# Altium PCB TT1-1A-BASIS.PcbDoc
Units mm, origin at the board's own origin, x right, y up, seen from the top; angles counter-clockwise.
Board outline 120 x 120 mm, 2 copper layers (Top Layer, Bottom Layer), stack 1.57 mm thick; 49 components, 43 nets, 150 pads, 0 vias.
Unrouted connection lines stored in the file: 81.
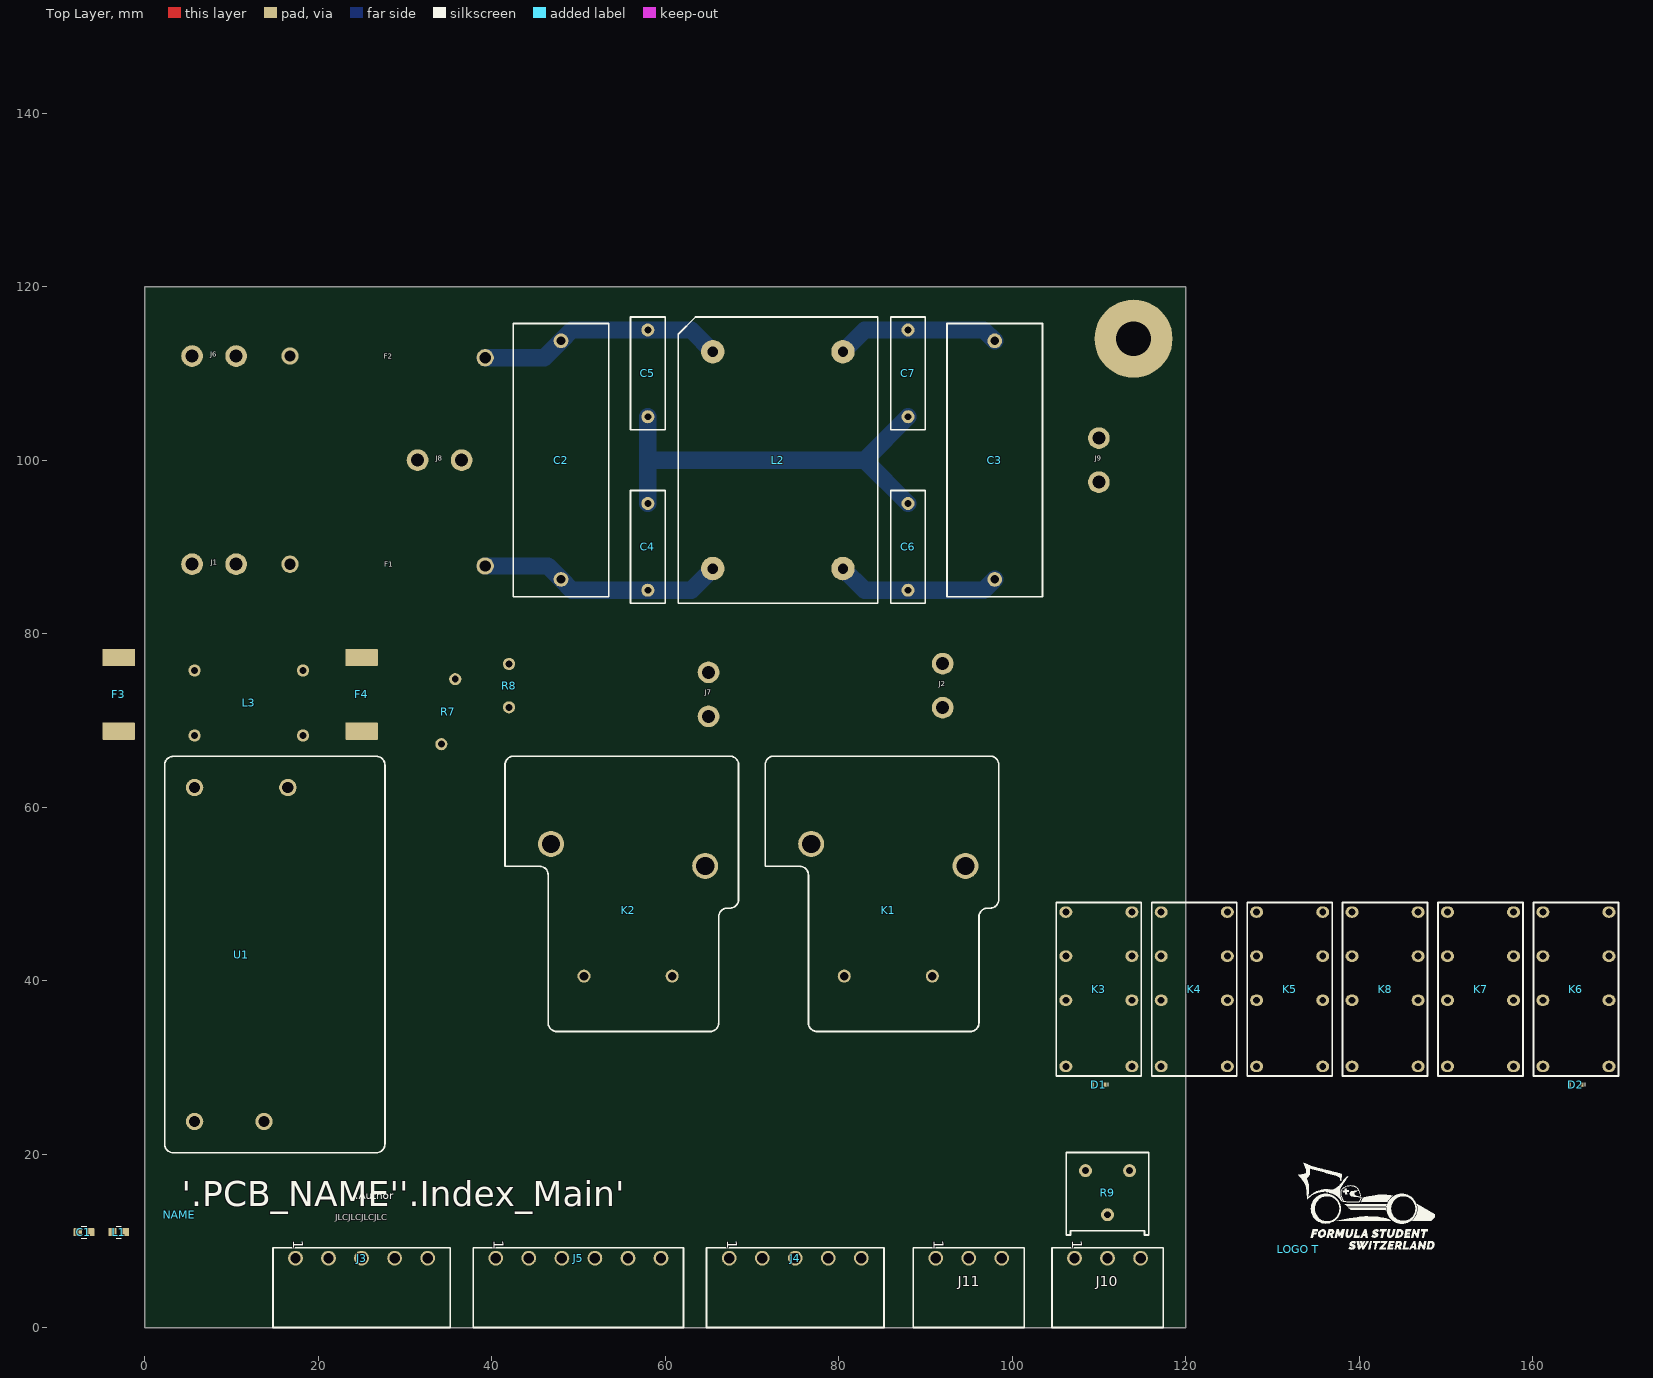
[diagram p0: Top Layer view]
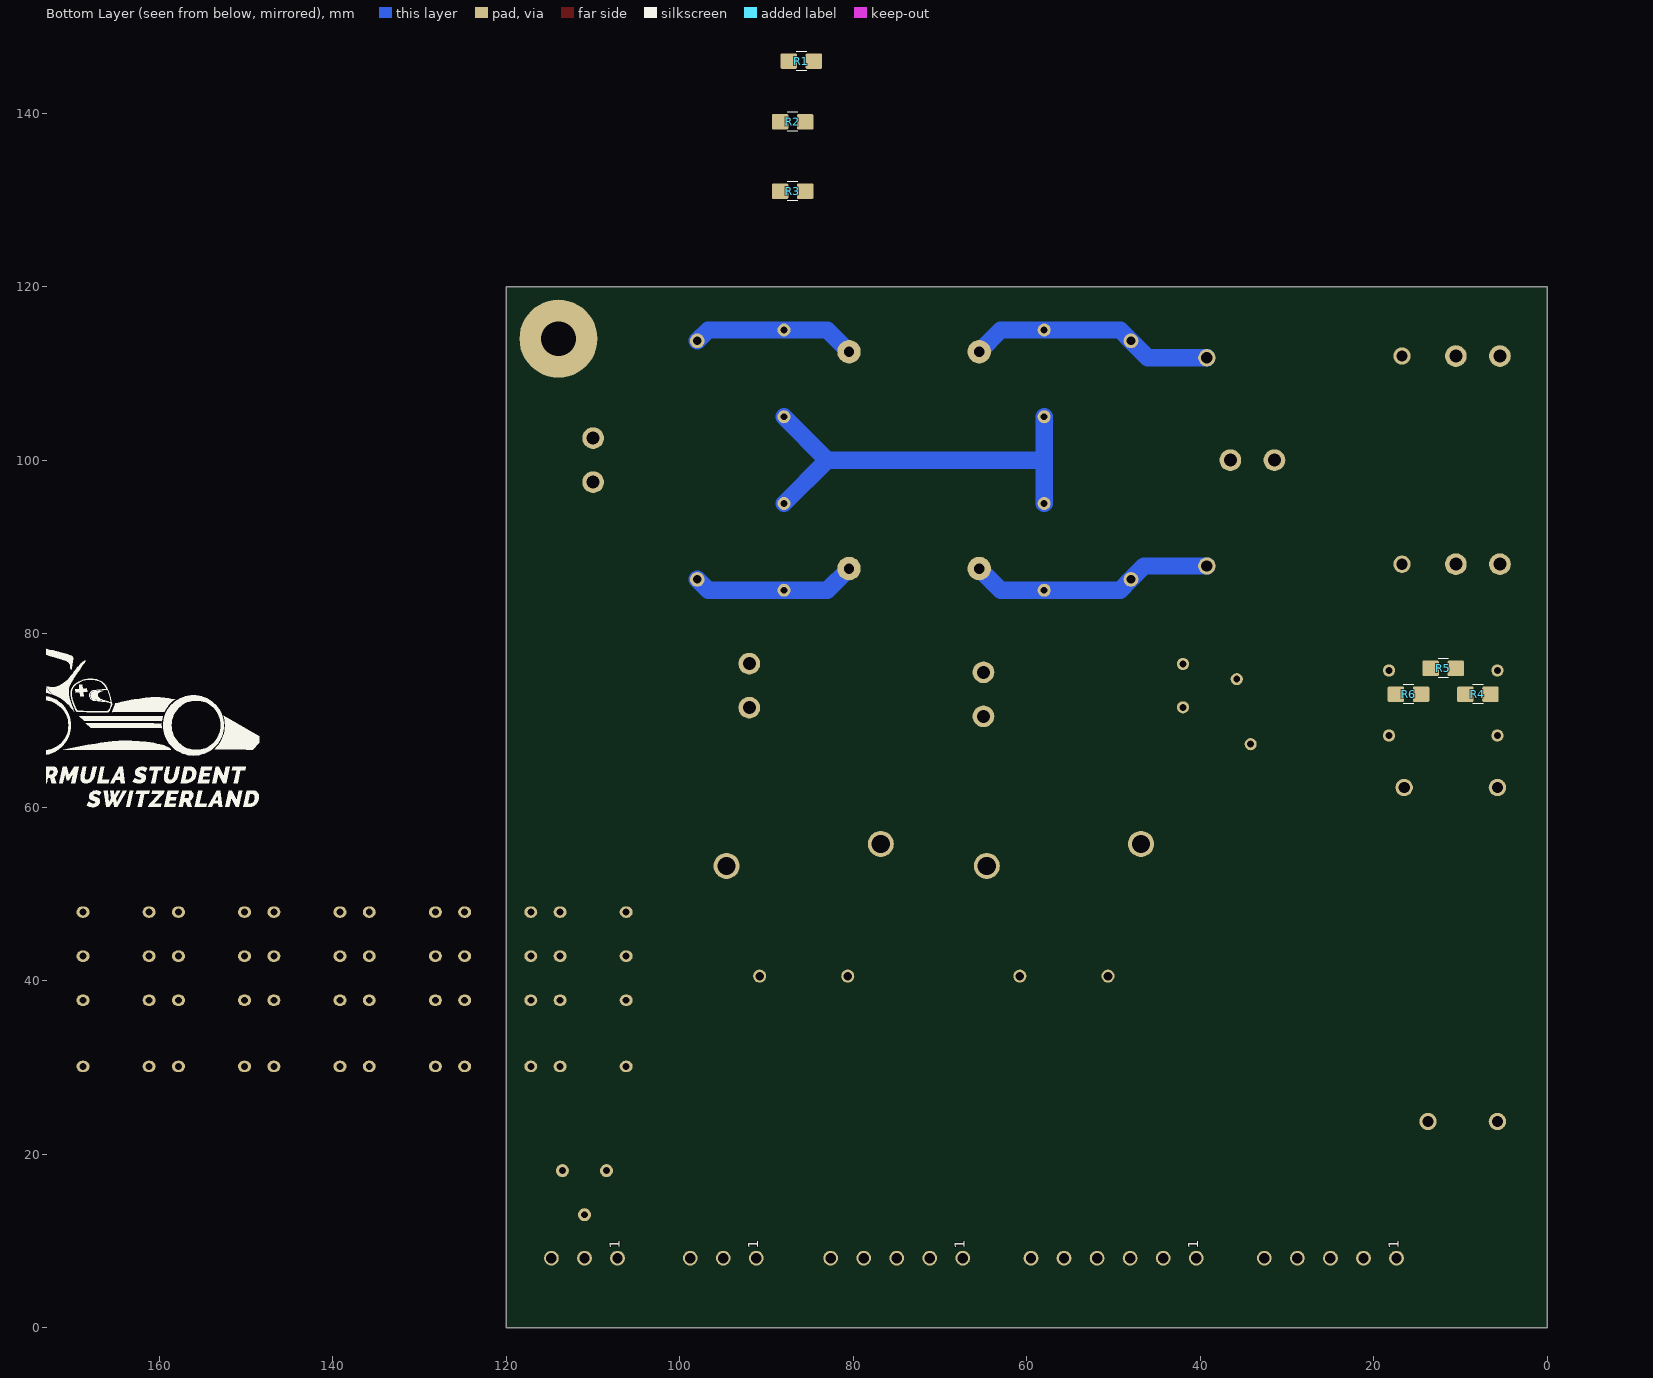
[diagram p1: Bottom Layer view, seen from below]

## Layer stack, top to bottom
Top Solder: solder mask 0.0102, Solder Resist, Dk 3.5
Top Layer: signal copper 0.035
Dielectric 1: dielectric 1.5, FR-4, Dk 4.8
Bottom Layer: signal copper 0.035
Bottom Solder: solder mask 0.0102, Solder Resist, Dk 3.5

## Board outline
0,0 0,120 120,120 120,0

## Design rules (kind name [scope] priority, off if disabled: settings)
BoardOutlineClearance [not (InComponent('MOUSE*'))] p1 off: gap=0.3 ignorepadtopadclearanceinfootprint=FALSE except(0: Arc-SplitContinuation Track-SplitContinuation SMDPad-SplitContinuation THPad-SplitContinuation Via-SplitContinuation Fill-SplitContinuation Poly-SplitContinuation Region-SplitContinuation Text-SplitContinuation)
Clearance Clearance_Mains [InNetClass('Mains') vs not InNetClass('Mains')] p1: gap=8 ignorepadtopadclearanceinfootprint=FALSE
Clearance Clearance_Mains_LN1 [InNet('LN_INV_1') or InNet('LN_SMPS_1') vs InNet('L_INV_CMC') or InNet('L_SMPS_F') or InNet('LN_INV_2') or InNet('LN_SMPS_2')] p2: gap=1 ignorepadtopadclearanceinfootprint=FALSE
Clearance Clearance_Mains_LN2 [InNet('LN_INV_2') or InNet('LN_SMPS_2') vs InNet('N_INV_CMC') or InNet('N_SMPS_R') or InNet('LN_INV_1') or InNet('LN_SMPS_1')] p3: gap=1 ignorepadtopadclearanceinfootprint=FALSE
Clearance Clearance_Mains_LN [InNetClass('Mains') vs InNetClass('Mains')] p4: gap=3 ignorepadtopadclearanceinfootprint=FALSE
Clearance [All] p5: gap=0.2 ignorepadtopadclearanceinfootprint=FALSE except(0: Arc-Hole Track-Hole SMDPad-Hole THPad-Hole Via-Hole Fill-Hole Poly-Hole Region-Hole Text-Hole)
ComponentClearance ComponentClearance_ESP-01S [All] p1: gap=0.254 collisioncheckmode=3 verticalgap=0.254 showdistances=FALSE
ComponentClearance ComponentClearance_Enclosure [isfree] p2: gap=0 collisioncheckmode=3 verticalgap=0 showdistances=FALSE
ComponentClearance [All] p3: gap=0.25 collisioncheckmode=3 verticalgap=0.25 showdistances=FALSE
DiffPairsRouting [InDifferentialPair('D') or InDifferentialPair('USB_D')] p1: maxlimit=0.15 minlimit=0.15 mostfreqgap=0.15 toplayer_minwidth=0.5 toplayer_maxwidth=0.5 toplayer_prefwidth=0.5 bottomlayer_minwidth=0.5 bottomlayer_maxwidth=0.5 bottomlayer_prefwidth=0.5 impedanceprofiledriven=TRUE impedanceprofileid={0B2F72EE-70D5-4F8D-B648-94B946845256} impedanceprofilevalue=90.000000 maxuncoupledlength=12.7
Height [All] p1: minheight=0 maxheight=100 prefheight=12.7
HoleSize [All] p1: absolutevalues=TRUE maxlimit=27 minlimit=0.3 maxpercent=80.000 minpercent=20.000
HoleToHoleClearance [All] p1: gap=0.3 allowstackedmicrovias=TRUE
MinimumSolderMaskSliver [All] p1: minsoldermaskwidth=0.1
PolygonConnect [All] p1: thpad.connectstyle=Relief thpad.reliefconductorwidth=0.2 thpad.reliefentries=4 thpad.polygonreliefangle="90 Angle" thpad.airgapwidth=0.2 smdpad.connectstyle=Relief smdpad.reliefconductorwidth=0.2 smdpad.reliefentries=4 smdpad.polygonreliefangle="90 Angle" smdpad.airgapwidth=0.2 via.connectstyle=Direct via.reliefconductorwidth=0.254 via.reliefentries=4 via.polygonreliefangle="90 Angle" via.airgapwidth=0.254
RoutingVias [All] p1: holewidth=0.35 width=0.7 viastyle="Through Hole" minholewidth=0.35 minwidth=0.7 maxholewidth=5 maxwidth=6
SilkToSilkClearance [All] p1: silktosilkclearance=0.1
SilkToSolderMaskClearance [IsPad] p1: minsilkscreentomaskgap=0.1 clearancetoexposedcopper=TRUE
SolderMaskExpansion "SolderMaskExpansion Via" [IsVia] p1: expansion=0.1 istentingtop=TRUE
SolderMaskExpansion [All] p2: expansion=0.05 istentingtop=FALSE
UnRoutedNet [All] p1: checkbadconnections=TRUE
Width [All] p1: maxlimit=5 minlimit=0.15 preferedwidth=0.3 minimp=50.000000 maximp=50.000000 favimp=50.000000
21 further rules are at their usual default settings.

## Classes and differential pairs
net class N: N N_INV N_INV_CMC N_INV_F
net class Mains: L L_INV L_INV_CMC L_INV_F L_SMPS L_SMPS_F LN_INV_1 LN_INV_2 LN_SMPS_1 LN_SMPS_2 N N_INV N_INV_CMC N_INV_F N_SMPS N_SMPS_F N_SMPS_R
net class L: L L_INV L_INV_CMC L_INV_F
component class TT1-1-Top: C1 C2 C3 C4 C5 C6 C7 D1 D2 F1 F2 F3 F4 J1 J2 J3 J4 J5 J6 J7 J8 J9 J10 J11 K1 K2 K3 K4 K5 K6 K7 K8 L1 L2 L3 R1 R2 R3 R4 R5 R6 R7 R8 R9 U1

## Components (designator, comment, footprint, x,y, rotation, side; value= is the part's Value field where it differs from the comment)
C1 "100N/0603/50V/X7R" CAP0603_X7R -7,11 r180 top value=100nF
C2 "1U/X2/27.5MM" CAP2750P315X110X190-BL 48,100 r90 top value=1UF
C3 "1U/X2/27.5MM" CAP2750P315X110X190-BL 98,100 r90 top value=1UF
C4 "2N2/Y2/10MM" CAP1000P130X40X90-BL 58,90 r90 top value=2.2nF
C5 "2N2/Y2/10MM" CAP1000P130X40X90-BL 58,110 r270 top value=2.2nF
C6 "2N2/Y2/10MM" CAP1000P130X40X90-BL 88,90 r90 top value=2.2nF
C7 "2N2/Y2/10MM" CAP1000P130X40X90-BL 88,110 r270 top value=2.2nF
D1 "BAS70-02V-G3-08" SOD1608X065 110,28 r180 top value=70V/100mA
D2 "BAS70-02V-G3-08" SOD1608X065 165,28 r180 top value=70V/100mA
F1 "Fuse 5x20mm" OGN_THR 28,88 r0 top
F2 "Fuse 5x20mm" OGN_THR 28,112 r0 top
F3 "3.15A/UMT250/FUSE" UMT250 -3,73 r270 top value=3.15A
F4 "3.15A/UMT250/FUSE" UMT250 25,73 r270 top value=3.15A
J1 "6.35mmx0.81mm Tab THT" Tab_THT_635 8,88 r180 top
J2 "6.35mmx0.81mm Tab THT" Tab_THT_635 92,74 r270 top
J3 "MC1.5/5-G-3.81" MC1.5/5-G-3.81 25,8 r0 top
J4 "MC1.5/5-G-3.81" MC1.5/5-G-3.81 75,8 r0 top
J5 "MC1.5/6-G-3.81" MC1.5/6-G-3.81 50,8 r0 top
J6 "6.35mmx0.81mm Tab THT" Tab_THT_635 8,112 r180 top
J7 "6.35mmx0.81mm Tab THT" Tab_THT_635 65,73 r270 top
J8 "6.35mmx0.81mm Tab THT" Tab_THT_635 34,100 r0 top
J9 "6.35mmx0.81mm Tab THT" Tab_THT_635 110,100 r90 top
J10 "MC1.5/3-G-3.81" MC1.5/3-G-3.81 111,8 r0 top
J11 "MC1.5/3-G-3.81" MC1.5/3-G-3.81 95,8 r0 top
K1 "AZ2150-1A-24" AZ2150-SPST-NO 85,50 r0 top
K2 "AZ2150-1A-24" AZ2150-SPST-NO 55,50 r0 top
K3 "AZ822-2C-24" AZ822 110,39 r0 top
K4 "AZ822-2C-24" AZ822 121,39 r0 top
K5 "AZ822-2C-24" AZ822 132,39 r0 top
K6 "AZ822-2C-24" AZ822 165,39 r0 top
K7 "AZ822-2C-24" AZ822 154,39 r0 top
K8 "AZ822-2C-24" AZ822 143,39 r0 top
L1 "30R/0603/FERRITE" FB0603 -3,11 r180 top value=30R
L2 "30MH/THT/CMC" CMC-WE-CMBNC-XL-7448050530 73,100 r270 top value=30MH
L3 "1MH/THT/CMC" DFKH-CASE-50-2 12,72 r90 top value=1MH
"LOGO B1" "Comment" FSCH-LOGO-20MM 180,60 r180 bottom
"LOGO T" "Comment" FSCH-LOGO-10MM 133,9 r0 top
NAME "Comment" PCB-NAME 4,13 r0 top
R1 "330K/1206" R1206-0.80-WW 86,146 r0 bottom value=330K
R2 "330K/1206" R1206-0.80-WW 87,139 r0 bottom value=330K
R3 "330K/1206" R1206-0.80-WW 87,131 r0 bottom value=330K
R4 "330K/1206" R1206-0.80-WW 8,73 r0 bottom value=330K
R5 "330K/1206" R1206-0.80-WW 12,76 r180 bottom value=330K
R6 "330K/1206" R1206-0.80-WW 16,73 r0 bottom value=330K
R7 "ERZ-V14D391" RESD750W80D155 35,71 r90 top value=391V
R8 "25R/THT/NTC" RESD500W60D115 42,74 r90 top value=25R
R9 "1K/3386F" 3386F 111,16 r0 top value=1K
U1 "IRM10-24" IRM10 15,43 r270 top
? "Comment" JLC-ORDER 26,14 r0 top

## Footprints (in the part's own frame and the unit in brackets; to place one, negate y for a bottom-side part, rotate by r counter-clockwise, add the part's x,y. Pads: shape width x height; smd on the part's side, far side on the other; paste and mask are expansions set on the pad)
3386F [mm]
  round 1.5 hole 0.8: 1(-2.54,2.083) 2(2.54,2.083) 3(0,-2.997)
  silkscreen extent -4.76,-5.33 4.76,4.19, body extent -4.76,-5.33 4.76,4.19, height 10.41
AZ822 [mm]
  oval 1.5x1.3 hole 0.8: 1(3.81,-8.89) 2(-3.81,-8.89) 3(3.81,-1.27) 4(3.81,3.81) 5(3.81,8.89) 6(-3.81,-1.27) 7(-3.81,3.81) 8(-3.81,8.89)
  silkscreen extent -4.9,-10 4.9,10, body extent -4.9,-10 4.9,10, height 12
AZ2150-SPST-NO [mm] "Zettler AZ2150 relais with 6 pins"
  round 1.5 hole 1: 1(-4.352,-9.485) 2(5.808,-9.485)
  round 3 hole 2.1: 3(9.618,3.215) 4(-8.162,5.755)
  silkscreen extent -13.46,-15.88 13.46,15.88, body extent -13.46,-15.88 13.46,15.88, height 19.1
CAP0603_X7R [mm]
  rrect20% 0.95x0.95 smd: 1(-0.725,0) 2(0.725,0)
  silkscreen extent -0.3,-0.7 0.3,0.7, body extent -0.8,-0.41 0.8,0.41, height 0.57
CAP1000P130X40X90-BL [mm]
  round 1.5 hole 0.8: 1(-5,0) 2(5,0)
  silkscreen extent -6.5,-2 6.5,2, body extent -6.5,-2 6.5,2, height 9
CAP2750P315X110X190-BL [mm]
  round 1.7 hole 1: 1(-13.75,0) 2(13.75,0)
  silkscreen extent -15.75,-5.5 15.75,5.5, body extent -15.75,-5.5 15.75,5.5, height 19
CMC-WE-CMBNC-XL-7448050530 [mm]
  round 2.7 hole 1.2: 1(-12.5,-7.5) 2(12.5,-7.5) 3(-12.5,7.5) 4(12.5,7.5)
  silkscreen extent -16.5,-11.5 16.5,11.5, body extent -16.5,-11.5 16.5,11.5, height 33.08
DFKH-CASE-50-2 [mm] "Pin Order different than in datasheet to match Schematic symbol"
  round 1.4 hole 0.8: 1(-3.75,6.25) 2(-3.75,-6.25) 3(3.75,6.25) 4(3.75,-6.25)
  body extent -5,-7.25 5,7.25, height 13.01
FB0603 [mm]
  rrect20% 0.95x0.95 smd: 1(-0.725,0) 2(0.725,0)
  silkscreen extent -0.3,-0.7 0.3,0.7, body extent -0.8,-0.4 0.8,0.4, height 1
FSCH-LOGO-10MM [mm]
  silkscreen extent 0,0 15.7,9.99, body extent 0,0 15.7,9.99, height 0.01
FSCH-LOGO-20MM [mm]
  silkscreen extent 0,0 31.48,20.02, body extent 0,0 31.48,20.02, height 0.01
IRM10 [mm]
  round 2 hole 1.3: 1(-19.25,-9.25) 2(-19.25,1.5) 3(19.25,-1.25) 4(19.25,-9.25)
  silkscreen extent -22.85,-12.7 22.85,12.7, body extent -22.85,-12.7 22.85,12.7, height 21.5
JLC-ORDER [mm] "Placement of JLCPCB order number"
MC1.5/3-G-3.81 [mm] "Phoenix contact MC 1,5/ 3-G-3,81"
  round 1.7 hole 1.2: 1(-3.81,0) 2(0,0) 3(3.81,0)
  silkscreen extent -6.41,-8 6.41,1.2, body extent -6.41,-8 6.41,1.2, height 7.26
MC1.5/5-G-3.81 [mm] "Phoenix contact MC 1,5/ 5-G-3,81"
  round 1.7 hole 1.2: 1(-7.62,0) 2(-3.81,0) 3(0,0) 4(3.81,0) 5(7.62,0)
  silkscreen extent -10.22,-8 10.22,1.2, body extent -10.22,-8 10.22,1.2, height 7.26
MC1.5/6-G-3.81 [mm] "Phoenix contact MC 1,5/ 6-G-3,81"
  round 1.7 hole 1.2: 1(-9.525,0) 2(-5.715,0) 3(-1.905,0) 4(1.905,0) 5(5.715,0) 6(9.525,0)
  silkscreen extent -12.12,-8 12.12,1.2, body extent -12.12,-8 12.12,1.2, height 7.26
OGN_THR [mm]
  round 2 hole 1.3: 1(-11.25,0) 2(11.25,-0.2)
  body extent -11.45,-5 11.45,4.6, height 11.51
PCB-NAME [mm]
R1206-0.80-WW [mm]
  rrect20% 1.9x1.8 smd: 1(-1.45,0) 2(1.45,0)
  silkscreen extent -0.6,-1.1 0.6,1.1, body extent -1.6,-0.8 1.6,0.8, height 0.62
RESD500W60D115 [mm]
  round 1.4 hole 0.8: 1(-2.5,0) 2(2.5,0)
  body extent -5.72,-2.5 5.78,2.5, height 16
RESD750W80D155 [mm]
  round 1.4 hole 0.8: 1(-3.75,0.8) 2(3.75,-0.8)
  body extent -7.72,-2.45 7.78,2.45, height 18.5
SOD1608X065 [mm] "SOD523"
  rrect50% 0.35x0.5 smd: 1(-0.725,0)
  rrect10% 0.35x0.5 smd: 2(0.725,0)
  silkscreen extent -1.1,-0.2 -1.1,0.2, body extent -0.8,-0.4 0.8,0.4, height 0.65
Tab_THT_635 [mm]
  round 2.5 hole 1.5: 1(-2.54,0) 1(2.54,0)
  body extent -3.96,-1.54 3.96,1.54, height 10.21
UMT250 [mm]
  rrect10% 2x3.75 smd: 1(-4.25,0) 2(4.25,0)
  body extent -5.45,-1.5 5.45,1.5, height 3.01

## Part data
C1: "CAP SM 0603 100nF 50V X7R", Absolute Value=1E-7, JLC Type=Basic, Manufacturer=GENERIC, Manufacturer 1=YAGEO, Manufacturer Part Number 1=CC0603KPX7R9BB104, Manufacturer Part Number 2=CC0603MRX7R9BB104, Package=0603, Supplier Part Number 1=311-3567-1-ND, Eurocircuits GPN=GPC0603104, HelpURL=https://www.yageo.com/upload/media/product/app/datasheet/mlcc/upy-gphc_x7r_6_3v-to-250v.pdf, Manufacturer 2=YAGEO, Part Number=100N/0603/50V/X7R, Supplier 1=Digi-Key, Supplier 2=Digi-Key, Supplier 3=LCSC, Supplier Part Number 2=311-4110-1-ND, Supplier Part Number 3=C14663
C2 C3: "CAP THT 31.5X11X19 1uF 305V X2", Absolute Value=1E-6, Manufacturer=GENERIC, Manufacturer 1="EPCOS - TDK Electronics", Manufacturer Part Number 1=B32924C3105K000, Supplier Part Number 1=495-4209-ND, HelpURL=https://product.tdk.com/en/system/files?file=dam/doc/product/capacitor/film/emi/data_sheet/20/20/db/fc_2009/x2_b32921_928.pdf, Part Number=1U/X2/27.5MM, Supplier 1=Digi-Key
C4 C5 C6 C7: "CAP THT 13X4X9 2.2nF 300V Y2", Absolute Value=2.2E-9, Manufacturer=GENERIC, Manufacturer 1="EPCOS - TDK Electronics", Manufacturer Part Number 1=B32021A3222K000, Supplier Part Number 1=495-4788-ND, HelpURL=https://www.tdk-electronics.tdk.com/inf/20/20/db/fc_2009/Y2_B32021_026.pdf, Part Number=2N2/Y2/10MM, Supplier 1=Digi-Key
D1 D2: "Small Signal Schottky Diode", Absolute Value=70V, JLC Type=Extended, Manufacturer=Vishay, Manufacturer 1="Vishay General Semiconductor - Diodes Division", Manufacturer 3="Vishay Intertech", Package=SOD523, Supplier Part Number 1=112-BAS70-02V-G3-08CT-ND, HelpURL=https://www.vishay.com/docs/85652/bas70-02v.pdf, Manufacturer Part Number 1=BAS70-02V-G3-08, Manufacturer Part Number 3=BAS70-02V-G3-08, Part Number=BAS70-02V-G3-08, Supplier 1=Digikey, Supplier 3=LCSC, Supplier Part Number 3=C3313114
F1 F2: library part Fuse/5x20mm/OGN, "open fuse holder, 5 x 20 mm, THR, IEC 60335-1", Manufacturer=Schurter, Manufacturer Part Number 1=3-132-873, Package=5X20, Supplier Part Number 1=486-3-132-873-ND, HelpURL=https://www.schurter.com/en/datasheet/typ_OGN.pdf, Manufacturer 1=Schurter, Part Number=Fuse/5x20mm/OGN, Supplier 1=Digi-Key
F3 F4: "Fuse 250VAC 3.15A UMT250", Absolute Value=3.15, Manufacturer=Schurter, Manufacturer Part Number 1=3403.0171.24, Package=UMT250, Supplier Part Number 1=486-3482-1-ND, HelpURL=https://www.schurter.com/en/datasheet/typ_UMT_250.pdf, Manufacturer 1=Schurter, Part Number=3.15A/UMT250/FUSE, Supplier 1=Digi-Key
J1 J2 J6 J7 J8 J9: library part Tab_025_THT, "CONN QC TAB 0.250 SOLDER", Manufacturer=GENERIC, Manufacturer 1="TE Connectivity AMP Connectors", Manufacturer 3="TE Connectivity", Manufacturer Part Number 1=1217861-1, Supplier Part Number 1=A100452CT-ND, HelpURL=https://www.te.com/usa-en/product-1217861-1.datasheet.pdf, Manufacturer Part Number 3=1217861-1, Part Number=Tab_025_THT, Supplier 1=Digi-Key, Supplier 3=LCSC, Supplier Part Number 3=C428480
J3 J4: "Phoenix contact MC 1,5/ 5-G-3,81", Manufacturer=Phoenix, Manufacturer Part Number 1=1803303, Supplier Part Number 1=277-1209-ND, HelpURL=https://www.phoenixcontact.com/en-us/products/pcb-header-mc-15-5-g-381-1803303?type=pdf, Manufacturer 1=Phoenix, Part Number=MC1.5/5-G-3.81, Supplier 1=Digi-Key
J5: "Phoenix contact MC 1,5/ 6-G-3,81", Manufacturer=Phoenix, Manufacturer Part Number 1=1803316, Supplier Part Number 1=277-1210-ND, HelpURL=https://www.phoenixcontact.com/en-us/products/pcb-header-mc-15-6-g-381-1803316?type=pdf, Manufacturer 1=Phoenix, Part Number=MC1.5/6-G-3.81, Supplier 1=Digi-Key
J10 J11: "Phoenix contact MC 1,5/ 3-G-3,81", Manufacturer=Phoenix, Manufacturer Part Number 1=1803280, Supplier Part Number 1=277-1207-ND, HelpURL=https://www.phoenixcontact.com/en-us/products/pcb-header-mc-15-3-g-381-1803280?type=pdf, Manufacturer 1=Phoenix, Part Number=MC1.5/3-G-3.81, Supplier 1=Digi-Key
K1 K2: "Miniature Power Relay, SPST-NO, 24V Coil, 40A 30VDC 300VAC", Manufacturer=Zettler, Manufacturer 1="American Zettler", Manufacturer Part Number 1=AZ2150-1A-24DEF, Supplier Part Number 1=3385-AZ2150-1A-24DEF-ND, HelpURL=https://www.azettler.com/pdfs/az2150.pdf, Part Number=AZ2150-1A-24, Supplier 1=Digi-Key
K3 K4 K5 K6 K7 K8: "Subminiature DIP Relay, DPDT, 24V 98mW Coil, 2A 220VDC 250VAC", Manufacturer=Zettler, Manufacturer 1="American Zettler", Manufacturer Part Number 1=AZ822-2C-24DE, Supplier Part Number 1=3385-AZ822-2C-24DE-ND, HelpURL=https://www.azettler.com/pdfs/az822.pdf, Part Number=AZ822-2C-24, Supplier 1=Digi-Key
L1: "30R@100MHz 5A 0603 Ferrite", Absolute Value=1000, Manufacturer=GENERIC, Manufacturer 1="Laird-Signal Integrity Products", Manufacturer Part Number 1=HI0603R300R-10, Package=603, Supplier Part Number 1=240-HI0603R300R-10CT-ND, HelpURL=https://www.laird.com/document/datasheet/hi0603r300r-10-datasheet, Part Number=30R/0603/FERRITE, Supplier 1=Digi-Key
L2: "CMC 30mH 5A Würth CMBNC 7448050530", Absolute Value=0.03, Manufacturer=Würth, Manufacturer 1="Würth Elektronik", Manufacturer Part Number 1=7448050530, Package=CMBNC, Supplier Part Number 1=732-5596-ND, HelpURL=https://www.we-online.com/components/products/datasheet/7448050530.pdf, Part Number=30MH/THT/CMC, Supplier 1=Digi-Key
L3: "CMC 1mH 2A THT Schurter DFKH-14-0003", Manufacturer=SCHURTER, Manufacturer 1="SCHURTER Inc.", Manufacturer Part Number 1=DFKH-14-0003, Package=15X10.5mm, Supplier Part Number 1=486-3121-ND, HelpURL=https://www.schurter.com/en/datasheet/typ_DFKH.pdf, Part Number=1MH/THT/CMC, Supplier 1=Digi-Key
R1 R2 R3 R4 R5 R6: "RES SM 1206 330K", Absolute Value=330000, Manufacturer=GENERIC, Manufacturer 1=YAGEO, Manufacturer Part Number 1=RC1206FR-07330KL, Package=1206, Supplier Part Number 1=311-330KFRCT-ND, HelpURL=https://www.yageo.com/upload/media/product/products/datasheet/rchip/PYu-RC_Group_51_RoHS_L_12.pdf, Part Number=330K/1206, Supplier 1=Digi-Key
R7: "VARISTOR 391V 6kA", Absolute Value=391, Manufacturer=GENERIC, Manufacturer 1="Panasonic Electronic Components", Package=7.5mm, Supplier Part Number 1=P7266-ND, HelpURL=https://industrial.panasonic.com/cdbs/www-data/pdf/AWA0000/AWA0000C1.pdf, Manufacturer Part Number 1=ERZ-V14D391, Part Number=ERZ-V14D391, Supplier 1=Digi-Key
R8: "RES NTC THT 5 25R", Absolute Value=25, Manufacturer=GENERIC, Manufacturer 1="EPCOS - TDK Electronics", Manufacturer Part Number 1=B57236S0250M000, Package=5mm, Supplier Part Number 1=495-3048-ND, HelpURL=https://product.tdk.com/system/files/dam/doc/product/protection/current/ntc-limiter/data_sheet/50/db/icl_16/s236.pdf, Part Number=25R/THT/NTC, Supplier 1=Digi-Key
R9: "RES POT 3386F 1K", Absolute Value=1000, Manufacturer=Bourns, Manufacturer 1="Bourns Inc.", Manufacturer Part Number 1=3386F-1-102TLF, Package=3386F, Supplier Part Number 1=3386F-1-102TLF-ND, HelpURL=https://www.bourns.com/docs/Product-Datasheets/3386.pdf, Part Number=1K/3386F, Supplier 1=Digi-Key
U1: "10W AC-DC PCB-Mount Green Power Module, 24V", Manufacturer 1="MEAN WELL USA Inc.", Manufacturer Part Number 1=IRM-10-24, Package=Module, Supplier Part Number 1=1866-3030-ND, HelpURL=https://www.meanwell-web.com/content/files/pdfs/productPdfs/MW/IRM-10/IRM-10-spec.pdf, Part Number=IRM10-24, Supplier 1=Digi-Key

## Free pads (board coordinates)
  round 9 hole 4: M(114,114)

## Nets (pads, with @x,y where several pads share a name; then routed paths per layer and width w, separated by ;. In a path a pad name is that pad's centre, name@x,y a point inside that pad or via, vN(x,y) a via of type N, cw(c..) or ccw(c..) an arc to the next point about the centre after c; other vN are vias at no path point)
+24V: C1.1 J3.1 J4.1 J5.1 K3.3 K4.6 K6.3 K7.6 L1.2
+24V_SMPS: L1.1 U1.3
ENDSWITCH_BOTTOM: D2.1 J4.2 K6.1
ENDSWITCH_TOP: D1.1 J3.2 K3.1
GND: C1.2 C4.2 C5.2 C6.2 C7.2 J3.5 J4.5 J5.5 J8.1 J9.1 K1.2 K2.2 pad.M U1.4 | length 49.1
  Bottom Layer w2: C4.2 58,100 ; C5.2 58,100 ; C6.2 83,100 ; C7.2 83,100 ; 58,100 83,100
L: F1.1 F3.1 J1.1
L_INV: J2.1 K1.3
L_INV_CMC: C3.1 C6.1 K1.4 L2.4 R1.1 | length 19.1
  Bottom Layer w2: L2.4 83,85 C6.1 96.75,85 C3.1
L_INV_F: C2.1 C4.1 F1.2 L2.2 | length 28.4
  Bottom Layer w2: F1.2 46.45,87.8 C2.1 49.25,85 C4.1 63,85 L2.2
L_SMPS: L3.1 U1.1
L_SMPS_F: F3.2 L3.3 R4.1 R7.1
LN_INV_1: R1.2 R2.1
LN_INV_2: R2.2 R3.1
LN_SMPS_1: R4.2 R5.2
LN_SMPS_2: R5.1 R6.1
N: F2.1 F4.1 J6.1
N_INV: J7.1 K2.3
N_INV_CMC: C3.2 C7.1 K2.4 L2.3 R3.2 | length 19.1
  Bottom Layer w2: L2.3 83,115 C7.1 96.75,115 C3.2
N_INV_F: C2.2 C5.1 F2.2 L2.1 | length 28.6
  Bottom Layer w2: F2.2 46.05,111.8 C2.2 49.25,115 C5.1 63,115 L2.1
N_SMPS: L3.2 U1.2
N_SMPS_F: F4.2 R8.1
N_SMPS_R: L3.4 R6.2 R7.2 R8.2
NetD1_2: D1.2 J3.3 K3.2 K4.2
NetD2_2: D2.2 J4.3 K6.2 K7.2
NetJ5_2: J5.2 K5.1
NetJ5_3: J5.3 K1.1 K2.1
NetJ5_4: J5.4 K8.2
NetJ10_1: J10.1 R9.1
NetJ10_2: J10.2 R9.3
NetJ10_3: J10.3 R9.2
NetJ11_1: J11.1 K5.3 K8.3
NetJ11_2: J11.2 K5.8
NetJ11_3: J11.3 K8.8
NetK3_5: K3.5 K3.6
NetK3_7: K3.7 K4.3
NetK3_8: K3.8 K4.1 K4.8
NetK4_5: K4.5 K5.2
NetK5_5: K5.5 K5.6
NetK6_5: K6.5 K6.6
NetK6_7: K6.7 K7.3
NetK6_8: K6.8 K7.1 K7.8
NetK7_5: K7.5 K8.1
NetK8_5: K8.5 K8.6
pads on no net: J3.4 J4.4 J5.6 K3.4 K4.4 K4.7 K5.4 K5.7 K6.4 K7.4 K7.7 K8.4 K8.7

## Silkscreen, mask and mechanical layers (free items; w line width, h text height)
Top Overlay:
  text ".Author" at 24.275,14.528 h1.5
Board:
  the board outline again, w0.2

## Text inside footprints (layer, text, board x,y; h text height)
J3: Top Overlay "1" at 16.737,10.036 h2 r270; Bottom Overlay "1" at 16.737,9.064 h2 r270
J4: Top Overlay "1" at 66.737,10.036 h2 r270; Bottom Overlay "1" at 66.737,9.064 h2 r270
J5: Top Overlay "1" at 39.832,10.036 h2 r270; Bottom Overlay "1" at 39.832,9.064 h2 r270
J10: Top Overlay "1" at 106.547,10.036 h2 r270; Bottom Overlay "1" at 106.547,9.064 h2 r270
J11: Top Overlay "1" at 90.547,10.036 h2 r270; Bottom Overlay "1" at 90.547,9.064 h2 r270
?: Top Overlay "JLCJLCJLCJLC" at 21.981,12.116 h1.2